# Altium PCB EE52_Digital_Oscilloscope.PcbDoc (part 4 of 5)
Units mil, origin at the board's own origin, x right, y up, seen from the top; angles counter-clockwise.
Board outline 7431 x 5662 mil, 2 copper layers (Top Layer, Bottom Layer); 305 components, 396 nets, 1532 pads, 389 vias.
Unrouted connection lines stored in the file: 2.
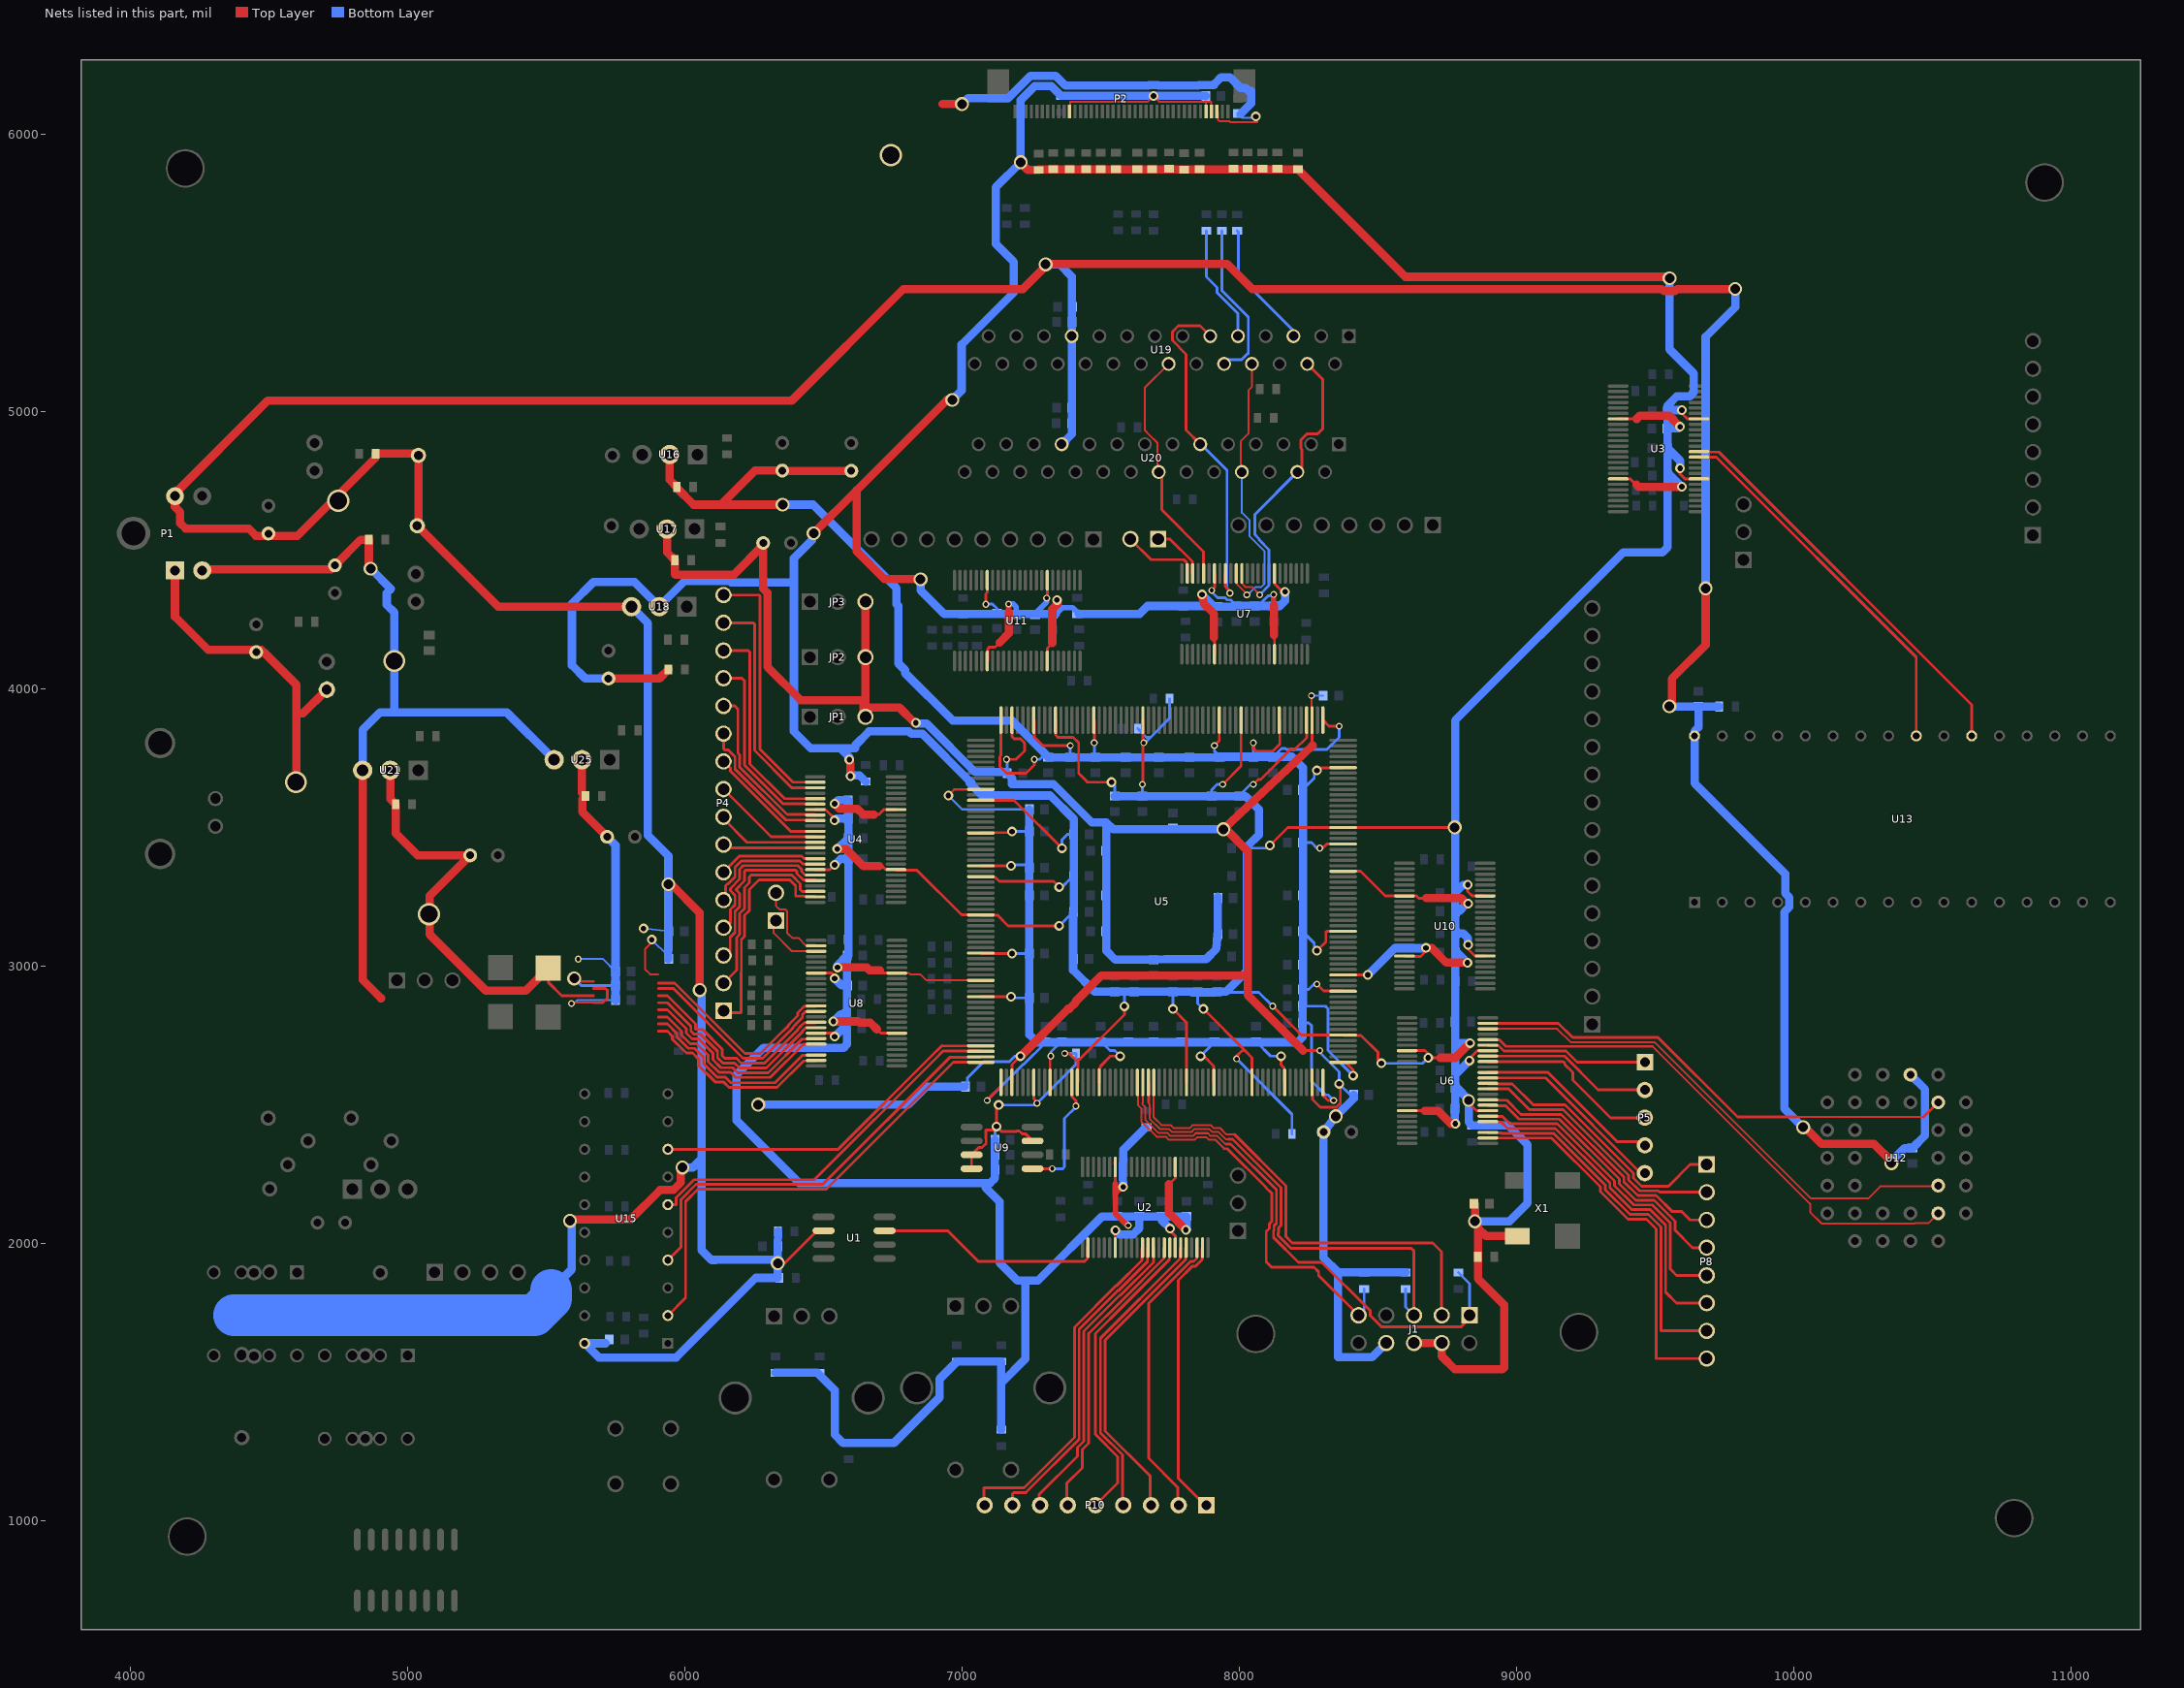
[diagram p4: the nets of this part, all layers, seen from the top]

## Via types
v1: diameter 35, hole 20, Top Layer to Bottom Layer, 188 vias
v2: diameter 25, hole 15, Top Layer to Bottom Layer, 82 vias
v3: diameter 60, hole 42, Top Layer to Bottom Layer, 48 vias
v4: diameter 50, hole 35, Top Layer to Bottom Layer, 46 vias
v5: diameter 80, hole 62, Top Layer to Bottom Layer, 14 vias
v6: diameter 40, hole 20, Top Layer to Bottom Layer, 10 vias
v7: diameter 45, hole 30, Top Layer to Bottom Layer, 1 vias

## Nets (pads, with @x,y where several pads share a name; then routed paths per layer and width w, separated by ;. In a path a pad name is that pad's centre, name@x,y a point inside that pad or via, vN(x,y) a via of type N, cw(c..) or ccw(c..) an arc to the next point about the centre after c; other vN are vias at no path point) (continued)
NetU3_11: U3.11 U13.24 | length 1402.3
  Top Layer w10: U3.11@9692.56,4834.07 9659.78,4834.07 U3.11@9658,4835.85 9720.15,4835.85 10442,4114 U13.24@10442,3830
NetU3_12: U3.12 U13.22 | length 1474.4
  Top Layer w10: U3.12@9658,4855.54 9659.78,4853.76 9730.24,4853.76 10642,3942 U13.22@10642,3830
NetU5_237: U5.237 U15.8 | length 1262.4
  Top Layer w10: U15.8@5938,2339 6552.85,2339 6886.09,2672.24 6925.89,2712.04 ; 6927.18,2711.89 U5.237@7047.17,2711.89
NetU5_238: U5.238 U15.6 | length 1372.7
  Top Layer w10: U15.6@5938,2139 5968,2139 5968,2164.35 6032.65,2229 6466.89,2229 6905.16,2667.27 6930.86,2692.97 6942.06,2692.97 ; 6942.07,2692.98 U5.238@7066.39,2692.98
NetU5_239: U5.239 U15.4 | length 1530.8
  Top Layer w10: U15.4@5938,1939 5985,1986 5985,2157.31 6039.69,2212 6497,2212 6955.04,2670.04 7005.17,2670.04 7005.87,2670.74 U5.239@7065.39,2670.74
NetU5_240: U5.240 U15.2 | length 1674.4
  Top Layer w10: U15.2@5938,1739 6002,1803 6002,2150.27 6046.73,2195 6510,2195 6967.83,2652.83 U5.240@7030.5,2652.83
NetU6_20: U6.20 U12.22 | length 1930.8
  Top Layer w7: 8962.09,2710 9491.28,2710 10059,2142.28 10059,2112 10100,2071 10436.33,2071 ; 10437.33,2072 10485,2072 U12.22@10521,2108
  Top Layer w10: U6.20@8896.53,2734.07 8938.02,2734.07 8962.09,2710
NetU6_22: U6.22 U12.24 | length 1897.6
  Top Layer w7: U6.22@8896.53,2773.44 9146.64,2773.44 9196.08,2724 9499.2,2724 10062.2,2161 10268,2161 10312,2205 10518,2205 U12.24@10521,2208
NetU6_23: U6.23 U12.31 | length 1786.5
  Top Layer w7: 10006.5,2455 10468,2455
  Top Layer w10: U6.23@8896.53,2793.13 9151,2793.13 9202.12,2742 9510,2742 9797,2455 10006.5,2455 ; 10468,2455 U12.31@10521,2508
NetU7_13: U7.13 U19.4 U20.4 | length 1136.1
  Top Layer w7: U7.13@8008.78,4416 8008.78,4380.22 8022.13,4366.87 ; 8024,4366.6 8046.4,4366.6 8061,4352 8061,4351 v2(8073,4339)
  Top Layer w10: U20.4@8209,4782 8226,4799 8226,4862.67 8222,4866.67 8222,4897.33 8243.67,4919 8282.33,4919 8301,4937.67 8301,5116 U19.4@8245,5172
  Bottom Layer w10: v2(8073,4339) 8106.95,4372.95 8106.95,4501.97 8070.59,4538.33 8072,4539.74 8055.47,4556.27 8055.47,4628.47 U20.4@8209,4782
NetU7_14: U7.14 U19.8 U20.8 | length 1056
  Top Layer w7: U7.14@7989.1,4416 7989.1,4379.9 8030.4,4338.6 v2(8026.93,4338.6) v2@8019.4,4338.6 ; U20.8@8009,4782 8005,4786 8005,4893 8033.5,4921.5 8033.5,5077.09 8045,5088.59 U19.8@8045,5172
  Bottom Layer w7: U20.8@8009,4782 8009,4634.61 8037.03,4606.58 8037.03,4549.97 8090,4497 8090,4377.92 8079.08,4367 8058.8,4367 8022.61,4330.81 v2@8022.61,4338.9 ; v2(8026.93,4338.6) 8022.91,4338.6 v2@8022.61,4338.9 ; v2@8022.61,4338.9 8022.51,4339 8020.75,4337.25 8020.96,4337.25 v2@8022.61,4338.9
NetU7_16: U7.16 U19.11 U20.11 | length 1268.9
  Top Layer w10: U20.11@7859,4882 7808,4933 7808,5206.67 7758,5256.67 7758,5287.33 7779.67,5309 7858,5309 U19.11@7895,5272 ; U7.16@7949.73,4416 7949.73,4369.27 7966,4353 v2(7966,4345)
  Bottom Layer w10: U20.11@7859,4882 7861.33,4882 7955.47,4787.85 7955.47,4363.53 7966,4353 v2(7966,4345)
NetU7_20: U7.20 U19.14 U20.14 | length 879.5
  Top Layer w7: U20.14@7709,4782 7705,4786 7705,4886.2 7673.7,4917.5 7673.5,4917.5 7659,4932 7659,5086 U19.14@7745,5172
  Top Layer w10: U20.14@7709,4782 7720,4771 7720,4646 7870.99,4495.01 U7.20@7870.99,4416
NetU8_13: U8.13 | length 755.4
  Top Layer w10: 5904,2938.6 5962.38,2938.6 6216.87,2684.1 6271.9,2684.1 6355,2767.21 6355,2766 6372.6,2783.6 6372.6,2786.34 6384,2797.74 6384,2798.12 6406.6,2820.72 6406.6,2831.31 6429.73,2854.44 6471.22,2854.44 U8.13@6473,2856.22
NetU8_14: U8.14 | length 751.5
  Top Layer w10: 5904,2918.72 5958.21,2918.72 6209.83,2667.1 6246.02,2667.1 6246.12,2667 6280.04,2667 6389.6,2776.56 6389.6,2779.3 6401,2790.7 6401,2791.08 6423.6,2813.68 6423.6,2824.27 6434.09,2834.76 6471.22,2834.76 U8.14@6473,2836.54
NetU8_16: U8.16 | length 756.7
  Top Layer w10: 5904,2893.13 5936.04,2893.13 6038.4,2790.78 6038.4,2772.56 6039.96,2771 6063.1,2771 6134.57,2699.53 6134.57,2676.39 6143.85,2667.1 6185.79,2667.1 6202.79,2650.1 6238.98,2650.1 6239.08,2650 6287.08,2650 6406.6,2769.52 6406.6,2772.25 6418,2783.66 6418,2784.04 6429.34,2795.39 6471.22,2795.39 U8.16@6473,2797.17
NetU8_17: U8.17 | length 714.3
  Top Layer w10: 5904,2867.54 5936.04,2867.54 6021.4,2782.18 6021.4,2765.52 6032.92,2754 6056.06,2754 6117.57,2692.49 6117.57,2669.35 6136.81,2650.1 6178.75,2650.1 6196.81,2632.04 6293.17,2632.04 6423.6,2762.47 6423.6,2765.21 6434.09,2775.7 6435,2775.7 6435,2777
NetU8_19: U8.19 | length 736.4
  Top Layer w10: 5904,2841.95 5936.04,2841.95 6004.4,2773.59 6004.4,2758.47 6025.88,2737 6049.02,2737 6100.57,2685.45 6100.57,2662.31 6129.77,2633.1 6171.7,2633.1 6189.77,2615.04 6300.21,2615.04 6421.5,2736.33 6471.22,2736.33 U8.19@6473,2738.11
NetU8_20: U8.20 | length 730.8
  Top Layer w10: 5904,2816.36 5936.04,2816.36 5987.4,2765 5987.4,2751.43 6018.83,2720 6041.98,2720 6083.57,2678.41 6083.57,2655.26 6122.73,2616.1 6164.66,2616.1 6182.72,2598.04 6307.25,2598.04 6427.63,2718.43 U8.20@6473,2718.43
NetU8_22: U8.22 | length 718.9
  Top Layer w10: 5904,2790.77 5936.04,2790.77 5970.4,2756.41 5970.4,2744.39 6011.79,2703 6034.94,2703 6066.57,2671.37 6066.57,2648.22 6115.69,2599.1 6145.76,2599.1 6166.03,2578.84 6325.16,2578.84 6423.6,2677.28 6471.22,2677.28 U8.22@6473,2679.06
NetU8_23: U8.23 | length 713.3
  Top Layer w10: 5904,2765.18 5936.04,2765.18 5953.4,2747.82 5953.4,2737.35 6004.75,2686 6027.9,2686 6049.57,2664.33 6049.57,2641.18 6108.65,2582.1 6138.72,2582.1 6158.99,2561.84 6332.2,2561.84 6427.96,2657.59 6471.22,2657.59 U8.23@6473,2659.37
RED0: R74.2 U19.5 | length 463.6
  Bottom Layer w10: R74.2@7992,5651.47 7997,5646.47 7997,5490 8195,5292 U19.5@8195,5272
RED1: R73.1 U19.10 | length 585.1
  Bottom Layer w10: R73.1@7937,5652.47 7937,5436 8029,5344 8029,5343.67 8032,5340.67 8032,5209 8029.67,5209 8008,5187.33 7960.33,5187.33 U19.10@7945,5172
RED2: R76.2 U19.9 | length 427.7
  Bottom Layer w10: R76.2@7881,5652.47 7881,5486 7920,5447 7920,5428.96 7995,5353.96 U19.9@7995,5272
RESET: U1.7 U2.2 | length 822.7
  Top Layer w10: U1.7@6720,2045 6948,2045 7058.4,1934.6 7441.42,1934.6 7451.91,1945.09 7451.91,1984 U2.2@7453.69,1984
SROMNCS: U5.14 U9.1 | length 451
  Top Layer w10: U9.1@7254,2269 v2(7325,2269) ; U5.14@7395.91,2580 7395.91,2529.09 7410,2515 v2(7410,2495)
  Bottom Layer w10: v2(7325,2269) 7363,2269 7369,2275 7369,2449.96 7414.04,2495 v2(7410,2495)
TCK: J1.1 R11.2 U5.27 | length 1973
  Top Layer w7: 7650.91,2506.16 7650.91,2500.89 7660,2491.8 7660,2445.4 7707.4,2398 7740.4,2398 7751.4,2387 7832.6,2387 7842.6,2397 7886.4,2397 7896.4,2387 7905.61,2387 7906.72,2388.1 7918.32,2388.1 7948.42,2358 7952.66,2358 ; 7651.81,2506.16 U5.27@7651.81,2580
  Top Layer w10: 7952.66,2358 7968.92,2358 8133.5,2193.42 8133.5,2071.66 8125,2063.16 8125,2046.7 8123,2044.7 8123,2021.2 8213.2,1931 8297.73,1931 8471.53,1757.2 8471.53,1739.74 8513.27,1698 8800,1698 8830,1728 J1.1@8830,1740 J1.1@8812.8,1722.8
  Bottom Layer w10: R11.2@8790,1894.53 8830,1854.53 J1.1@8830,1740
TDI: J1.9 R1.1 U5.26 | length 1484.5
  Top Layer w7: U5.26@7633.91,2580 7633.91,2498.09 7646,2486 7646,2439.6 7701.6,2384 7734.6,2384 7745.6,2373 7838.4,2373 7848.4,2383 7880.6,2383 7890.6,2373 7911.41,2373 7912.52,2374.1 7945.62,2341
  Top Layer w10: 7945.62,2341 7956.73,2341 8096.22,2201.51 8096.22,2200.5 8116.5,2180.22 8116.5,2078.7 8108,2070.2 8108,2053.75 8097,2042.75 8097,1933 8116,1914 8269.04,1914 8286,1897.04 8286,1884 J1.9@8430,1740
  Bottom Layer w10: J1.9@8450,1760 R1.1@8450,1835.47
TDO: J1.3 U5.29 | length 1708.7
  Top Layer w7: U5.29@7691.18,2580 7691.18,2453.82 7719,2426 7751.99,2426 7762.99,2415 7821.01,2415 7831.01,2425 7897.99,2425 7906.89,2416.1 7929.91,2416.1 7954.02,2392 7983,2392
  Top Layer w10: 7983,2392 8167.5,2207.5 8167.5,2024.78 8190.78,2001.5 8697.5,2001.5 8729,1970 J1.3@8729,1741
TMS: J1.5 R2.1 U5.28 | length 1747.5
  Top Layer w7: 7673.28,2508.72 7673.28,2504.13 7677.18,2500.22 7677.18,2448.02 7713.2,2412 7746.2,2412 7757.2,2401 7826.8,2401 7836.8,2411 7892.2,2411 7901.09,2402.1 7924.11,2402.1 7951.22,2375 7959.7,2375
  Top Layer w10: 7673.28,2508.72 U5.28@7673.28,2580 ; 7959.7,2375 7975.96,2375 8150.5,2200.46 8150.5,2064.62 8142,2056.12 8142,2039.66 8140,2037.66 8140,2028.24 8186.24,1982 8620,1982 8630,1972 J1.5@8630,1740
  Bottom Layer w10: R2.1@8600,1835.47 8600,1770 J1.5@8630,1740
UNUSED0_0: P4.16 U4.2 | length 934.6
  Top Layer w10: P4.16@6139,4338 6267,4338 6270.02,4334.98 6270.02,3782.02 6389.29,3662.76 U4.2@6470,3662.76
UNUSED0_1: P4.15 U4.3 | length 845.1
  Top Layer w10: P4.15@6139,4238 6247,4238 6251,4234 6251,3777 6384.93,3643.07 U4.3@6470,3643.07
UNUSED0_2: P4.14 U4.5 | length 788.9
  Top Layer w10: P4.14@6139,4138 6229,4138 6234,4133 6234,3729.04 6359.34,3603.7 U4.5@6470,3603.7
UNUSED0_3: P4.13 U4.6 | length 697.1
  Top Layer w10: P4.13@6139,4038 6205,4038 6214.53,4028.47 6214.53,3724.47 6353.21,3585.79 6468.22,3585.79 U4.6@6470,3584.02
UNUSED0_4: P4.12 U4.8 | length 612.3
  Top Layer w10: P4.12@6139,3938 6179,3938 6191,3926 6191,3768.77 6197.53,3762.24 6197.53,3717.43 6368.53,3546.42 6468.22,3546.42 U4.8@6470,3544.65
UNUSED0_5: P4.11 U4.9 | length 519.1
  Top Layer w10: P4.11@6139,3838 6139,3783 6142.47,3779.53 6156.2,3779.53 6180.53,3755.2 6180.53,3710.39 6364.18,3526.74 6468.22,3526.74 U4.9@6470,3524.96
UNUSED0_6: P4.10 U4.11 | length 441.5
  Top Layer w10: P4.10@6139,3738 6163.53,3713.47 6163.53,3703.35 6381.29,3485.59 U4.11@6470,3485.59
UNUSED0_7: P4.9 U4.12 | length 402.3
  Top Layer w10: P4.9@6139,3638 6311.09,3465.91 U4.12@6470,3465.91
UNUSED0_8: P4.8 U4.13 | length 373.1
  Top Layer w10: P4.8@6139,3538 6139,3531 6223.78,3446.22 U4.13@6470,3446.22
UNUSED0_9: P4.7 U4.14 | length 335.7
  Top Layer w10: P4.7@6139,3438 6150.46,3426.54 U4.14@6470,3426.54
UNUSED0_10: P4.6 U4.16 | length 364.9
  Top Layer w10: P4.6@6139,3338 6140,3337 6146.53,3337 6146.53,3346.21 6196.32,3396 6421.21,3396 6430.04,3387.17 U4.16@6470,3387.17
UNUSED0_11: P4.5 U4.17 | length 445.2
  Top Layer w10: P4.5@6139,3238 6146.53,3238 6146.53,3289.69 6153.31,3296.47 6156.2,3296.47 6180.53,3320.8 6180.53,3356.17 6203.36,3379 6414.17,3379 6425.69,3367.48 U4.17@6470,3367.48
UNUSED0_12: P4.4 U4.19 | length 562.2
  Top Layer w10: P4.4@6139,3138 6145,3132 6152,3132 6152,3143.12 6163.53,3154.65 6163.53,3203.8 6180.53,3220.8 6180.53,3255.2 6163.53,3272.2 6163.53,3279.76 6197.53,3313.76 6197.53,3349.12 6210.4,3362 6407.12,3362 6420.6,3348.53 6420.6,3340.38 6432.87,3328.11 U4.19@6470,3328.11
UNUSED0_13: P4.3 U4.20 | length 644.1
  Top Layer w10: P4.3@6139,3038 6143,3034 6163,3034 6163,3103.27 6180.53,3120.8 6180.53,3196.76 6197.53,3213.76 6197.53,3262.24 6183.79,3275.98 6214.53,3306.72 6214.53,3342.08 6217.44,3345 6400.08,3345 6403.6,3341.48 6403.6,3333.34 6426.73,3310.2 6470,3310.2 U4.20@6470,3308.43
UNUSED0_14: P4.2 U4.22 | length 699.6
  Top Layer w10: P4.2@6139,2938 6186,2985 6186,3102.23 6197.53,3113.76 6197.53,3189.72 6214.53,3206.72 6214.53,3282.67 6231.53,3299.67 6231.53,3321.57 6237.96,3328 6384.89,3328 6415.86,3297.03 6415.86,3276.27 6423.08,3269.06 U4.22@6470,3269.06
UNUSED0_15: P4.1 U4.23 | length 822.2
  Top Layer w10: P4.1@6139,2838 6145,2832 6202,2832 6202,2976.96 6203,2977.96 6203,3095.19 6214.53,3106.72 6214.53,3182.67 6231.53,3199.67 6231.53,3275.63 6266.9,3311 6377.85,3311 6398.86,3289.99 6398.86,3252.06 6430.18,3252.06 6431.09,3251.15 6468.22,3251.15 U4.23@6470,3249.37
UNUSED0_16: P11.2 U8.2 | length 297.2
  Top Layer w7: P11.2@6328,3264 6328,3217.29 6341.26,3204.03 6361.88,3204.03 6368.03,3197.88 6368.03,3119.97 6388,3100 6410.74,3100 6434.71,3076.03 6469.72,3076.03 U8.2@6473,3072.76
UNUSED0_17: P11.1 U8.3 | length 228.6
  Top Layer w7: P11.1@6328,3164 6320,3156 6320,3119 6385.93,3053.07 U8.3@6473,3053.07
UNUSED1_0: P10.9 U2.12 | length 1252.6
  Top Layer w10: P10.9@7078,1055 7078,1118 7222.96,1118 7405,1300.04 7405,1696.97 7554,1845.97 7556.6,1845.97 7648.76,1938.13 7648.76,1982.22 U2.12@7650.54,1984
UNUSED1_1: P10.8 U2.13 | length 1155.3
  Top Layer w10: P10.8@7181,1055 7181,1095.86 7181.18,1095.86 7186.31,1101 7230,1101 ; 7232.5,1103.5 7422,1293 7422,1689.93 7561.04,1828.97 7563.64,1828.97 7668.44,1933.78 7668.44,1982.22 U2.13@7670.22,1984
UNUSED1_2: P10.7 U2.14 | length 1114.7
  Top Layer w10: P10.7@7278,1044 7278,1094 7416,1232 7416,1262.96 7439,1285.96 7439,1682.89 7568.08,1811.97 7570.68,1811.97 7689.91,1931.2 U2.14@7689.91,1984 U2.14@7688.13,1982.22
UNUSED1_3: P10.6 U2.16 | length 1076
  Top Layer w10: P10.6@7378,1055 7378,1135 7433,1190 7433,1255.92 7456,1278.92 7456,1675.85 7458.26,1675.85 7577.38,1794.97 7577.72,1794.97 7727.5,1944.75 7727.5,1982.22 U2.16@7729.28,1984
UNUSED1_4: P10.5 U2.17 | length 1107.3
  Top Layer w10: P10.5@7481,1055 7561,1135 7561,1229.92 7480,1310.92 7480,1673.55 7584.42,1777.97 7584.76,1777.97 7747.18,1940.39 7747.18,1982.22 U2.17@7748.96,1984
UNUSED1_5: P10.4 U2.19 | length 1081.6
  Top Layer w10: P10.4@7578,1055 7578,1236.96 7499,1315.96 7499,1657.54 7786.55,1945.09 7786.55,1982.22 U2.19@7788.33,1984
UNUSED1_6: P10.3 U2.20 | length 1117.1
  Top Layer w10: P10.3@7678,1055 7678,1161 7516,1323 7516,1650.49 7806.24,1940.73 7806.24,1982.22 U2.20@7808.02,1984
UNUSED1_7: P10.2 U2.22 | length 1074.6
  Top Layer w10: P10.2@7796,1039 7778,1057 7778,1119 7673,1224 7673,1783.45 7824.15,1934.6 7835.12,1934.6 7845.61,1945.09 7845.61,1982.22 U2.22@7847.39,1984
UNUSED1_8: P10.1 U2.23 | length 1051.2
  Top Layer w10: U2.23@7867.07,1984 7865.29,1982.22 7865.29,1940.73 7842.16,1917.6 7831.19,1917.6 7780,1866.41 7780,1152 P10.1@7894,1038 ; P10.1@7870.07,1065.93 P10.1@7881,1055
UNUSED1_9: P8.8 U6.2 | length 1403
  Top Layer w10: U6.2@8896.53,2379.74 9125.97,2379.74 9302.47,2203.24 9302.47,2186.51 9401.98,2087 9469,2087 9504,2052 9504,1584 P8.8@9686,1584
UNUSED1_10: P8.7 U6.3 | length 1316.3
  Top Layer w10: U6.3@8896.53,2399.43 8896.53,2397.65 8945.23,2397.65 8946.13,2396.74 9133.01,2396.74 9319.47,2210.28 9319.47,2193.55 9409.02,2104 9476.04,2104 9521,2059.04 9521,1684 P8.7@9686,1684
UNUSED1_11: P8.6 U6.5 | length 1212.8
  Top Layer w10: U6.5@8896.53,2438.8 8898.31,2437.02 8945.23,2437.02 8968.5,2413.74 9140.05,2413.74 9336.47,2217.32 9336.47,2200.59 9416.06,2121 9483.08,2121 9538,2066.08 9538,1823.17 9577.17,1784 P8.6@9686,1784
UNUSED1_12: P8.5 U6.6 | length 1136.1
  Top Layer w10: U6.6@8896.53,2458.48 8896.53,2456.7 8949.58,2456.7 8975.54,2430.74 9147.09,2430.74 9353.47,2224.36 9353.47,2207.63 9423.1,2138 9490.12,2138 9555,2073.12 9555,1906.17 9577.17,1884 P8.5@9686,1884
UNUSED1_13: P8.4 U6.8 | length 1031.4
  Top Layer w10: U6.8@8896.53,2497.85 8898.31,2496.07 8960.93,2496.07 9009.26,2447.74 9154.13,2447.74 9370.47,2231.4 9370.47,2214.67 9430.15,2155 9497.17,2155 9572,2080.17 9572,2047.17 9635.17,1984 P8.4@9686,1984
UNUSED1_14: P8.3 U6.9 | length 979.9
  Top Layer w10: U6.9@8896.53,2517.54 8896.53,2515.76 8965.28,2515.76 9016.3,2464.74 9161.17,2464.74 9387.47,2238.44 9387.47,2221.72 9437.19,2172 9504.21,2172 9562.21,2114 9596,2114 9626,2084 P8.3@9686,2084
UNUSED1_15: P8.2 U6.11 | length 953.7
  Top Layer w10: U6.11@8896.53,2556.91 8971.09,2556.91 9046.26,2481.74 9168.22,2481.74 9404.47,2245.49 9404.47,2228.76 9444.23,2189 9511.25,2189 9516.25,2184 P8.2@9686,2184
UNUSED1_16: P8.1 U6.12 | length 985.1
  Top Layer w10: U6.12@8896.53,2576.59 8898.31,2574.81 8984.31,2574.81 9060.38,2498.74 9175.26,2498.74 9421.47,2252.53 9421.47,2235.8 9451.27,2206 9548,2206 9626,2284 P8.1@9686,2284
UNUSED1_17: P5.5 U6.13 | length 708.7
  Top Layer w10: U6.13@8896.53,2596.28 9104.72,2596.28 9448,2253 P5.5@9463,2253
UNUSED1_18: P5.4 U6.14 | length 675.4
  Top Layer w10: U6.14@8896.53,2615.96 9113.04,2615.96 9363,2366 9450,2366 P5.4@9463,2353
UNUSED1_19: P5.3 U6.16 | length 660
  Top Layer w10: U6.16@8896.53,2655.33 9168.58,2655.33 9174,2649.92 9174,2644.96 9203,2615.96 9203,2588 9339,2452 P5.3@9453,2452
UNUSED1_20: P5.2 U6.17 | length 602.6
  Top Layer w10: U6.17@8896.53,2675.02 9172.94,2675.02 9293.96,2554 P5.2@9449,2554
UNUSED1_21: P5.1 U6.19 | length 581.9
  Top Layer w10: U6.19@8896.53,2714.39 8898.31,2712.61 8935.44,2712.61 8955.05,2693 9179,2693 9219,2653 P5.1@9453,2653
UNUSED2_2: P7.1 U7.22 | length 200.3
  Top Layer w10: P7.1@7707,4540 7749.11,4540 7829.84,4459.27 7829.84,4417.78 U7.22@7831.62,4416
UNUSED2_3: P7.2 U7.23 | length 279.1
  Top Layer w10: P7.2@7607,4540 7681.6,4465.4 7799.66,4465.4 7810.15,4454.91 7810.15,4416 U7.23@7811.93,4416
VCC5: C1.2 C92.2 C93.2 C96.2 C99.2 C105.2 C106.2 C107.2 C109.2 C112.1@4497,4560 C123.2 P1.2 R5.1 R46.2 R53.1 R61.1 R63.1 R105.1 U1.2 U12.32 U13.32 U15.20 U18.3 U19.21 U20.21 | length 20069.5
  Top Layer w7: v1@5840,3125 v1(5850,3135) ; v1(5880,3095) 5880,3085 5856.1,3061.1 5856.1,2987.89 5874.08,2969.91 5904,2969.91
  Top Layer w10: v4(6334.4,1928.07) 6359.07,1928.07 6476,2045 U1.2@6500,2045 ; v4(10034,2418) 10037.5,2418 10045.5,2410 v4@10047,2411.5 ; v4(10352.5,2289) v4@10352.5,2295.22 ; U12.32@10421,2606 U12.32@10421,2608
  Top Layer w30: P1.2@4152,4696.72 4494.28,5039 6385,5039 6788,5442 7219,5442 7310,5533 7955,5533 8046,5442 9524.53,5442 9532.53,5434 9571.47,5434 9579.47,5442 v4(9789,5442) ; P1.2@4160,4668.72 4160,4656 4179,4637 4179,4597 4198,4578 4426,4578 4452,4552 4602,4552 4883.53,4833.53 R105.1@4883.53,4848 5032,4848 R61.1@5038,4842 5038,4592 R63.1@5034,4588 5326,4296 U18.3@5807,4296 ; v4@5580,2075 5591,2086 5804,2086 5910,2192 5957.47,2192 5985,2219.53 5985,2267 v4(5991,2273) ; v4(5940,3295) 5950,3295 6053,3192 v4(6053,2913) ; v4(9551.56,3936.44) 9560,3944.88 9560,4036 9682,4158 v4(9682,4362) ; v4@10047,2411.5 10100.5,2358 10289.72,2358 10352.5,2295.22 v4@10355.61,2292.11
  Bottom Layer w7: v1(5850,3135) C123.2@5940,3125 ; v1(5880,3095) 5938.5,3036.5 5942.44,3032.56 C99.2@5942.44,3025 ; 5940,3057.44 5942.44,3055 ; v4(6334.4,1928.07) 6333,1929.47 6334.4,1931.93 6334.44,1931.99 6335.76,1934.31 v4@6339,1940
  Bottom Layer w10: v4(10352.5,2289) 10346,2289 10352.5,2295.5 v4@10361,2304
  Bottom Layer w30: 5517,1832 5591,1906 v4@5591,2081 ; C96.2@5713.44,1639 U15.20@5638,1639 5689,1588 5968.11,1588 6255.11,1875 6333.91,1875 6333.91,1875.06 v4(6334.4,1928.07) ; U18.3@5807,4296 5866,4237 5866,3471.33 5940,3397.33 v4(5940,3295) 5940,3125 5940,3057.44 ; C99.2@5938.5,3025 5938.5,3036.5 5938.5,3066.36 ; v4(5991,2273) 6028,2273 6060,2305 ; v4(6053,2913) 6060,2906 6060,2305 ; 6102,1940 v4@6334.51,1940 ; 6111,1939 6096,1939 6060,1975 6060,2305 ; v4@6334.47,1935.04 v4@6334.51,1940 ; v4@6334.51,1940.04 6334.53,1941.99 6334.97,1989 R53.1@6335.47,2043 ; v4@6339,1940 v4@6334.51,1940 ; v4(7301,5531) 7351,5531 7396,5486 7396,5377 7396,5273 U19.21@7395,5272 7395,4918 U20.21@7359,4882 ; v4(9551.56,3936.44) C92.2@9656,3936.44 9656.44,3936 R46.2@9730.47,3936 ; C92.2@9656,3931 9656,3861 9642,3847 U13.32@9642,3830 9642,3659.18 9969,3332.18 9969,3262.4 9984,3247.4 9984,3212.6 9965.5,3194.1 9965.5,2486.5 v4(10034,2418) ; v4(9682,4362) 9682,5269 9789,5376 v4(9789,5442) ; v4(10352.5,2289) v4@10352.5,2295.5 ; v4@10361,2304 10400.06,2343.06 C93.2@10428,2343.06 10474,2389.06 10474,2555 U12.32@10421,2608 ; v4(6334.4,1928.07) 6334.4,1931.93 6334.44,1931.99 v4(6334.4,1928.07)
  Bottom Layer w150: 4372.5,1740 5457,1740 5517,1800 5517,1832
  other v4: 5585,2081
  other v5: 4749,4678
VCC5A: C98.2 C102.1 C121.2 C122.2 R101.2 U25.2 | length 1736.9
  Top Layer w7: v2@5601.75,2867.54 5669.75,2867.54 ; v2(5615,3025) v2@5621.85,3018.15
  Top Layer w10: v4(5600,2955) 5614.43,2955 5603.75,2944.32 5669.75,2944.32 ; 5669.75,2867.54 5702.54,2867.54 5719.15,2884.15 5719.15,2912.85 5713,2919 5670.02,2919 5669.75,2918.72
  Top Layer w30: U25.2@5628,3744 5628,3625.47 R101.2@5640.47,3613 5629,3601.53 5629,3556 C102.1@5719,3466
  Bottom Layer w7: v2(5590,2865) 5590,2857 5591,2856 5612,2877 C121.2@5749.44,2877 ; v2(5615,3025) 5704.44,3025 C122.2@5749.44,2980
  Bottom Layer w10: v4@5600,2965 v4(5600,2955) 5626,2929 C98.2@5749.44,2929
  Bottom Layer w30: C102.1@5719,3466 5749.44,3435.56 C122.2@5749.44,2980 C98.2@5749.44,2929 C121.2@5749.44,2877
VCC33: C2.2 C3.2 C4.2 C5.2 C6.2 C7.2 C8.2 C9.2 C10.2 C11.2 C12.2 C13.2 C14.2 C15.2 C16.2 C17.2 C18.2 C19.2 C20.2 C21.2 C22.2 C23.2 C24.2 C25.2 C26.2 C27.2 C28.2 C29.2 C30.2 C31.2 C32.2 C33.2 C34.2 C35.2 C36.2 C37.2 C76.2 C77.2 C78.2 C79.2 C80.2 C81.2 C82.2 C83.2 C84.2 C85.2 C86.2 C87.2 C88.2 C89.2 C90.2 C91.2 C104.1 C115.2 J1.4 J1.6 P2.3 P2.4 P2.29 R3.2 R4.2 R6.2 R9.2 R12.2 R13.1 R15.2 R22.2 R23.2 R24.2 R26.2 R28.2 R30.2 R39.2 R40.2 R41.2 R45.1 R54.1 R55.1 R57.1 R58.1 R59.1 R60.1 R66.2 R69.1 R70.2 R71.1 R72.2 R75.1 R77.1 R78.2 R79.1 R80.2 R81.1 R85.1 R86.2 R87.1 R88.2 R89.1 R90.2 R93.2 U2.7 U2.18 U2.31 U2.42 U3.7 U3.18 U3.31 U3.42 U4.7 U4.18 U4.31 U4.42 U5.7 U5.15 U5.35 U5.47 U5.66 U5.77 U5.96 U5.104 U5.124 U5.136 U5.154 U5.170 U5.192 U5.206 U5.213 U5.225 U6.7 U6.18 U6.31 U6.42 U7.7 U7.18 U7.31 U7.42 U8.7 U8.18 U8.31 U8.42 U9.3 U9.7 U9.8 U10.7 U10.18 U10.31 U10.42 U11.7 U11.18 U11.31 U11.42 U18.2 X1.4 | length 40686.1
  Top Layer w7: U8.42@6764.34,2974.33 6808.14,2974.33 6812.47,2970 6848.6,2970 6870.49,2948.11 U5.225@7067.17,2948.11 ; 7167.73,4275.27 7168,4275 ; P2.29@7387.5,6081.5 7389.91,6081.5 7389.91,6116.6 7668.6,6116.6 v1(7690,6138) 7710,6118 7710,6117.37 7879.63,6117.37 P2.4@7879.63,6081.5 ; U2.42@7551.09,2293.34 7552.92,2275.42 U2.42@7553.02,2274.43 ; 7879,6118 7899,6118 7899,6081.81 P2.3@7899.31,6081.5 ; v2(8123.61,4340) v2@8126.89,4336.72 ; U5.124@8242.36,3838.36 U5.124@8242.36,3887.09 ; 9565,4970 9565,4972
  Top Layer w10: U4.18@6470,3347.8 6522.8,3347.8 v1(6540,3365) ; U4.7@6470,3564.33 6507.13,3564.33 6539,3532.46 v1(6539,3525) ; U8.18@6473,2757.8 6537.2,2757.8 6540,2755 v1(6540,2745) ; U8.7@6473,2974.33 6529.33,2974.33 6529.6,2974.6 6540,2964.2 v1(6540,2955) ; 6682,3546.5 6699.61,3546.5 6717.44,3564.33 U4.42@6761.34,3564.33 ; 6693,2771 6706.2,2757.8 U8.31@6764.34,2757.8 ; 6704,2975.24 6763.43,2975.24 U8.42@6764.34,2974.33 ; 6711.94,3360.06 6722.43,3349.57 6759.56,3349.57 U4.31@6761.34,3347.8 6763.12,3346.02 6836.03,3346.02 6997.71,3184.33 U5.213@7067.17,3184.33 7068.94,3182.55 7128.46,3182.55 7166.01,3145 v1(7350,3145) ; U9.8@7034,2269 U9.7@7034,2319 7060,2345 7071.94,2345 7086,2359.06 7086,2378.94 7085.47,2379.47 7085.47,2408.53 7111.53,2408.53 v1(7124,2421) ; U5.206@7067.17,3322.13 7068.94,3320.35 7118.68,3320.35 7134.02,3305 7330,3305 v1(7350,3285) ; U5.192@7067.17,3597.72 7187.28,3597.72 v1(7360,3425) ; v2(7085,4305) 7085,4342.53 7090.36,4347.88 U11.18@7090.36,4391.56 ; U11.31@7090.36,4100.22 7092.13,4102 7092.13,4145.21 7096.54,4149.62 7118.13,4149.62 7134.5,4166 ; v1(7131.69,2498.5) 7131.69,2500.31 7126,2506 7124,2504 v1(7124,2421) ; U9.3@7254,2369 7228,2395 7216.06,2395 7206.06,2405 7196.72,2405 7194.22,2402.5 7142.5,2402.5 v1(7124,2421) ; U5.7@7258.11,2580 7258.11,2519.89 7270,2508 v2(7270,2505) ; U11.42@7306.89,4100.22 7306.89,4146.89 7325,4165 ; v2@7306.89,4321.11 U11.7@7306.89,4356.55 ; U5.170@7336.85,3887.09 7336.85,3833.15 7345,3825 7400,3825 7420,3805 7420,3695 7451.5,3663.5 7451,3663 v1(7539,3663) ; v1(7342,4320) 7342,4310 v1@7345,4307 ; v2(7370,2685) 7385,2685 7415.59,2654.41 ; U5.15@7417.37,2581.78 7417.37,2657.37 7585,2825 v1(7585,2855) ; U2.42@7551.09,2293.34 7551.3,2275.33 7552,2214 ; U2.7@7552.11,1984 7552.11,2045.33 v1(7553,2046.22) ; v1@7576,2203 v1(7581,2203) ; v2(7650,3655) 7650,3665 7651.81,3666.81 v2@7651.81,3795 ; U5.154@7651.81,3887.09 v2@7651.81,3795 ; v2(7655,3805) 7655,3798.19 v2@7651.81,3795 ; 7746,2213 7768.65,2235.65 U2.31@7768.65,2275.34 ; v1(7750,2053) 7751,2052 7751,2044 7768.65,2026.35 U2.18@7768.65,1984 ; v1(7760,2845) 7809.29,2795.71 U5.35@7809.29,2580 ; v1(7870,2845) 8020,2695 ; v2(7900,4355) 7910.36,4365.36 U7.18@7910.36,4416 ; 7908.58,4184 7910.36,4182.22 U7.31@7910.36,4124.66 ; v2(7940,3655) 8006.14,3721.14 U5.136@8006.14,3887.09 ; v2(7990,2665) 7990,2675 8010,2695 8020,2695 ; U5.47@8045.51,2580 8045.51,2669.49 8020,2695 ; v2(8050,3655) 8068,3673 8077,3673 8184.5,3780.5 8199.65,3780.5 8242.36,3823.21 U5.124@8242.36,3838.36 ; v1(8110,3435) 8174.29,3499.29 U5.104@8374.25,3499.29 v4@8782.29,3499.29 ; v2(8120,2855) 8223.74,2751.26 U5.66@8374.25,2751.26 8376.03,2749.48 8438.83,2749.48 8499.5,2688.81 8499.5,2661.5 v1(8512,2649) ; 8123.61,4302.39 8125,4301 ; 8125,4193 8126.89,4191.11 U7.42@8126.89,4124.66 ; U7.7@8126.89,4416 8126.89,4378.87 8155.76,4350 v1(8165,4350) v1@8168,4350 ; U5.77@8374.25,2967.8 8461.2,2967.8 8463,2966 v1(8463,2968) ; U5.96@8374.25,3341.81 8437.05,3341.81 8526.22,3252.65 U10.31@8595.66,3252.65 8639.16,3252.65 8647.31,3244.5 8674,3244.5 ; U10.42@8595.66,3036.11 8597.44,3034.33 8653.33,3034.33 8673,3054 v1(8673,3065) ; U6.42@8605.19,2478.17 8668,2478.17 ; U6.31@8605.19,2694.7 8670,2694.7 8681,2683.7 v1(8681,2669) 8724,2669 ; v1(8824,3293) 8824,3269 8840,3253 8840,3252.65 U10.18@8887,3252.65 ; v1(8825,3076) 8825,3070.98 8820,3065.98 8848.09,3037.89 8850,3037.89 8850,3036.11 U10.7@8887,3036.11 ; v7(8827,2515) 8827,2506 8854.83,2478.17 U6.7@8896.53,2478.17 ; v1(8830,2659) 8823.69,2659 8857.62,2692.92 8857.92,2692.92 8859.7,2694.7 U6.18@8896.53,2694.7 ; U3.42@9366.66,4757.11 9410.17,4757.11 9431.28,4736 9433,4736 ; U3.31@9366.66,4973.65 9433.65,4973.65 ; v1(9590,4795) 9590,4774.72 9607.61,4757.11 U3.7@9658,4757.11 U3.7@9663,4757.11 ; v1@9595,4995 9616.35,4973.65 U3.18@9658,4973.65
  Top Layer w20: 7167.73,4275.27 v2(7167.73,4305.48) ; 7552,2214 7553.02,2105.98 7594,2065 v2@7600,2065 ; 7556,2183 v1@7576,2203 ; 8123.61,4302.39 v2(8123.61,4340)
  Top Layer w30: C104.1@5724,4037 5907.47,4037 R66.2@5940.47,4070 ; v4(6464,4561) 6620,4717 ; v1(6535,2800) 6623,2800 6628,2795 6669,2795 6693,2771 ; v1(6540,3585) 6558,3567 6622,3567 6642.5,3546.5 6682,3546.5 ; v1(6549,3422) 6582,3422 6643.94,3360.06 6701.94,3360.06 ; v1(6550,2995) 6655.14,2995 6665.64,2984.5 6703.83,2984.5 6704,2984.33 ; v1(6593,3744) 6593,3737 6597,3733 v1(6597,3685) ; v4(6850,4395) 6720,4395 6620,4495 6620,4717 ; v4(6964,5042) 6945,5042 6620,4717 ; 7134.5,4166 7168,4199.5 7168,4275 ; v4@7214.9,5893 7236.43,5871.47 R90.2@7276,5871.47 ; R90.2@7276,5873.47 R77.1@7329,5873.47 R87.1@7447,5873.47 7632,5873.47 7801,5873.47 8211.53,5873.47 8599,5486 9547,5486 v4(9552,5481) ; 7325,4165 7325,4287 v1@7345,4307 ; 7746,2213 7746,2109 v1(7807,2048) ; v1(7865,4340) 7872.43,4306.57 7908.58,4270.42 7908.58,4184 ; 8125,4193 8125,4301 ; J1.6@8630,1640 J1.4@8730,1640 8730,1593 8778,1545 8949,1545 8955,1551 8955,1778 8860.47,1872.53 R13.1@8860.47,1951 8860.47,2055.53 ; 8668,2478.17 8715.95,2478.17 8763.11,2431 v1(8779,2431) ; v1(8673,3065) 8694,3065 8747,3012 v1(8823,3012) ; 8674,3244.5 8799.5,3244.5 8800,3245 v1@8820,3225 ; 8724,2669 8779,2669 v1(8832,2722) ; C14.2@8850,2141.56 v4(8850,2079) 8860.47,2058.53 8860.47,2055.53 ; X1.4@9002.9,2026 8890,2026 8860.47,2055.53 ; 9433,4736 9441,4728 9595,4728 v1(9596,4729) ; 9433.65,4973.65 9445,4985 9552,4985 9565,4972 ; 9565,4970 v1(9590,4945)
  Bottom Layer w7: C32.2@7261.28,4269.28 C32.2@7261.56,4269.56 ; C37.2@7327,4268.56 C37.2@7327,4269.56 ; v1@7675,6138.53 7676.47,6138.53 7690,6125 v1(7690,6138) ; v2@7895.9,4354.1 v2@7900,4358.2 ; v2(7900,4355) 7903.2,4355 v2@7900,4358.2 ; v2@7901.8,4360 v2@7900,4358.2 ; v2@8040,3655 v2(8050,3655) ; C22.2@8778.47,2624 C22.2@8779.56,2624 ; C4.2@9542.56,4939 C4.2@9544.47,4939 ; C5.2@9544.56,5002 C5.2@9551.56,4995
  Bottom Layer w10: C26.2@6582.44,2775 C26.2@6584.44,2775 ; C20.2@6584.44,2930 C20.2@6586.44,2930 C20.2@6584.44,2932 ; C25.2@6585.44,3038 C25.2@6589,3038 ; C6.2@6589,3597.56 C6.2@6589.44,3598 ; 7026.51,3660.51 7033.35,3660.51 ; v2(7085,4305) 7110,4305 7125,4290 C33.2@7125,4272.56 ; C29.2@7118.44,2374 7119,2374.56 v1@7119,2414 ; v1(7131.69,2498.5) v2@7268.5,2498.5 ; v2(7270,2505) 7410.47,2645.47 R24.2@7410.47,2685 v2(7370,2685) ; v1@7342,4317 v1(7342,4320) ; v1(7350,3145) 7400,3195 C84.2@7402.44,3195 ; v1(7350,3285) 7350,3275 7400,3325 C78.2@7402.44,3325 ; v1(7360,3425) 7360,3455 7380,3475 C77.2@7402.44,3475 ; v1(7539,3663) 7550,3652 C79.2@7550,3612.56 ; v1(7585,2855) 7585,2907.44 ; R22.2@7633.53,3856 7664.53,3825 7680,3825 ; C76.2@7650,3612.56 v2(7650,3655) ; v2(7655,3805) 7660,3805 7680,3825 ; R26.2@7748.53,3964 7748.53,3893.53 7680,3825 ; v1(7760,2845) C89.2@7760,2907.44 ; C9.2@7800.28,2087.72 C9.2@7809,2096.44 ; C91.2@7850,2907.44 7850,2905 7850,2865 v1(7870,2845) ; v2@7895.9,4354.1 7907.55,4342.45 7907.55,4342.16 7921.9,4327.8 7948.55,4327.8 7955.85,4320.5 7968.06,4320.5 C17.2@7990,4298.56 ; C80.2@7900,3612.56 7900,3635 7920,3655 v2(7940,3655) ; C88.2@7910,2905 8070,2905 v2(8120,2855) ; C24.2@7919.06,4298.5 C24.2@7921,4296.56 ; v2(7990,2665) 8189.53,2465.47 R4.2@8189.53,2395 ; C82.2@7997.56,3612.56 v2@8040,3655 ; C83.2@8027.56,3425 8030,3425 8100,3425 v1(8110,3435) ; C23.2@8067.21,4298.56 8103.65,4335 v2@8123.61,4335 ; v1(8463,2968) v1@8464,2968 ; v1(8512,2649) 8661,2649 v1(8681,2669) ; v1(8673,3065) v1@8673,3070 ; C30.2@8778.47,3266.09 C30.2@8779.56,3265 ; C21.2@8778.56,2561 8780,2559.56 C21.2@8780,2565 ; C31.2@8779.56,3048 C31.2@8787,3048 ; v1@8820,3225 v1(8825,3225) ; C11.2@9543.56,4869 C11.2@9544.47,4868.09 ; C10.2@9545.56,4769 C10.2@9556,4769
  Bottom Layer w20: v2(7167.73,4305.48) 7184.52,4305.48 7195,4295 C36.2@7195,4269.56 ; C32.2@7261.56,4269.56 7305,4313 v2(7305,4327) ; C37.2@7337.77,4269.56 7360.96,4292.75 7398.11,4292.75 R41.2@7419.5,4271.36 ; C8.2@7559,2096.44 7568.56,2096.44 v2@7600,2065
  Bottom Layer w30: C104.1@5724,4037 5640,4037 5592,4085 5592,4307 5670,4385 5818,4385 U18.2@5907,4296 5907,4297.11 5999.41,4389.53 6160.34,4389.53 6166.87,4383 6393,4383 ; R54.1@6326,1532.47 6477.53,1532.47 6540,1470 6540,1310 6570,1280 6753.97,1280 6918,1444.03 6918,1510.47 R55.1@6981,1573.47 R58.1@7141,1573.47 7141,1496 ; v4(6464,4561) 6466,4561 6458,4553 6458,4535.53 6393,4470.53 6393,4383 ; v1(6535,2800) 6561,2826 C19.2@6581.44,2826 ; v1(6539,3525) 6546,3532 C13.2@6588.44,3532 ; v1(6540,2745) 6570,2775 C26.2@6582.44,2775 ; v1(6540,2955) 6565,2930 6584.44,2930 C19.2@6584.44,2826 ; v1(6540,3365) 6561,3386 C12.2@6588.44,3386 ; v1(6540,3585) 6553,3598 C6.2@6589.44,3598 ; v1(6549,3422) 6549.44,3422 C7.2@6588.44,3461 ; v1(6550,2995) 6550,3002.56 C25.2@6584.44,3037 ; C26.2@6584.44,2775 6584.44,2717.44 6572,2705 6283,2705 6186,2608 6186,2443 6411.5,2217.5 7101.38,2217.5 ; C20.2@6584.44,2932 C25.2@6584.44,3037 ; C25.2@6585.44,3038 C25.2@6584.44,3037 ; C25.2@6589,3038 6589,3386 C6.2@6589,3597.56 ; v1(6593,3744) 6593,3753 6561,3785 ; v1(6597,3685) 6595,3687 6630.47,3687 R3.2@6652,3665.47 ; v4(6850,4395) 6850,4355 6935.44,4269.56 C36.2@7185,4269.56 ; v4(6964,5042) 6998,5076 6998,5241.47 7186.5,5429.97 7186.5,5539.36 7121.28,5604.58 7121.28,5809.28 v4(7211,5899) 7211,6123 7262,6174 7321.53,6174 R93.2@7357,6138.53 v1@7675,6138.53 ; 7026.51,3660.51 7072.02,3615 7317.67,3615 7402.44,3530.23 C77.2@7402.44,3475 C78.2@7402.44,3325 C84.2@7402.44,3195 ; 7033.35,3660.51 6856.28,3837.58 6849.44,3837.58 6849.36,3837.5 6816.64,3837.5 6808.14,3846 6663.82,3846 6614,3796.18 6614,3785 6561,3785 ; C29.2@7118.44,2374 C28.2@7118.44,2319 C27.2@7118.44,2265 7118.44,2234.56 7101.38,2217.5 ; R60.1@7141,1327.53 7141,1496 ; C36.2@7195,4269.56 7261.56,4269.56 C37.2@7327,4269.56 ; C37.2@7337.77,4269.56 C37.2@7327,4269.56 ; v1@7342,4317 7342,4284.56 C37.2@7327,4269.56 ; C84.2@7400,3192.56 7400,2985 7477.56,2907.44 C81.2@7550,2907.44 7585,2907.44 C87.2@7620,2907.44 C89.2@7760,2907.44 7827.56,2907.44 7830,2905 7850,2905 C88.2@7910,2905 ; R41.2@7419.5,4271.36 7419.5,4269.56 7639.56,4269.56 7668.56,4298.56 7877,4298.56 7877.06,4298.5 7906.5,4298.5 v1(7865,4340) ; C79.2@7550,3612.56 C76.2@7650,3612.56 C80.2@7900,3612.56 7997.56,3612.56 C82.2@8000,3612.56 8022.44,3612.56 8070,3565 8070,3472.67 8030,3432.67 C83.2@8030,3425 ; v1(7553,2046.22) 7567.22,2032 7617,2032 7639,2054 C3.2@7639,2096.44 ; C8.2@7559,2096.44 7503.94,2096.44 7272.5,1865 7222,1865 ; C8.2@7568.56,2096.44 C3.2@7639,2096.44 ; v1(7581,2203) 7580,2246 7581,2336.86 R23.2@7660.57,2416.43 ; v1@7699,6138.53 7877.91,6138.53 C115.2@7878.44,6138 ; v1(7750,2053) 7719,2084 C2.2@7719,2096.44 ; v1(7807,2048) 7810,2051 C9.2@7810,2094 ; C9.2@7809,2096.44 C2.2@7719,2096.44 ; C88.2@7920,2907.44 7952.44,2907.44 8027.56,2982.56 C90.2@8027.56,3035 C86.2@8027.56,3325 C83.2@8027.56,3425 ; C24.2@7921,4296.56 7988,4296.56 C17.2@7990,4298.56 C23.2@8055,4298.56 8067.21,4298.56 C18.2@8125,4298.56 8145.7,4298.56 8165,4317.86 v1(8165,4350) ; v1@8464,2968 8560,3064 v1@8667,3064 ; C16.2@8777.56,2485 8777.56,2432.44 v1(8779,2431) ; C16.2@8778.47,2495 C22.2@8778.47,2624 ; v4@8778.47,3500 R39.2@8778.47,3359 8778.47,3266.09 C15.2@8778.47,2701.09 ; v4@8778.47,3501 8778.47,3885.47 9385,4492 9526,4492 9544.47,4510.47 R15.2@9544.47,4660 C11.2@9544.47,4868.09 ; C22.2@8779.56,2608.56 v1(8830,2659) ; C22.2@8779.56,2624 C15.2@8779.56,2700 C15.2@8778.47,2701.09 ; C34.2@8779.56,3118 8807,3118 8825,3100 v1(8825,3076) ; C35.2@8779.56,3198 8793,3198 v1@8820,3225 ; C30.2@8779.56,3265 8807.56,3293 v1(8824,3293) ; C21.2@8784,2561 8827,2518 v7(8827,2515) 8827.5,2514.5 8827.5,2437.03 R9.2@8840,2424.53 8970.47,2424.53 9040,2355 9040,2145 8974,2079 v4(8850,2079) ; C31.2@8787,3048 v1(8823,3012) ; v1(8832,2722) 8799.38,2722 C15.2@8778.47,2701.09 ; 9544.47,4983.47 C4.2@9544.47,4939 ; C5.2@9544.56,5002 9544.56,5020.7 9577.5,5053.64 9577.5,5055 9625,5055 9639.5,5069.5 9639.5,5137.36 9552,5224.86 v4(9552,5481) ; C5.2@9551.56,4995 9561.56,5005 v1(9596,5005) ; C10.2@9556,4769 v1(9596,4729) ; v1@9584,4939 C4.2@9544.47,4939 ; v1(9590,4795) 9590,4822.56 C11.2@9544.47,4868.09 ; 6393,4383 6393,3846 6454,3785 6561,3785 ; 7101.38,2217.5 7084.44,2200.56 7135.5,2149.5 7135.5,1929.5 7200,1865 7222,1865 ; 7141,1496 7228,1583 7228,1859 7222,1865 ; C3.2@7639,2096.44 C2.2@7719,2096.44 ; C11.2@9544.47,4868.09 C4.2@9544.47,4939
  other v2: 7599,2064
  other v4: 8777,3500
VCC33A: C119.1 D5.2 R103.2 U21.2 | length 1662.5
  Top Layer w10: D5.2@5507,2992.58 5507,2941 5554.87,2893.13 5669.75,2893.13
  Top Layer w30: U21.2@4937,3706 4937,3602.47 R103.2@4956.47,3583 4956.47,3478.53 5036,3399 C119.1@5225,3399 5079,3253 5079,3114 5282,2911 5425.42,2911 D5.2@5507,2992.58
  other v5: 5076,3187
VCCA: C64.2 C65.2 C66.2 C67.2 C68.2 C69.2 C70.2 C71.2 C72.2 C73.2 C74.1 C75.2 C103.1 J1.8 JP1.3 JP2.3 JP3.3 R1.2 R2.2 R65.2 U5.3 U5.58 U5.123 U5.178 U17.2 | length 10326.8
  Top Layer w7: U5.58@8258.77,2583.28 U5.58@8262.05,2580 ; v2(8260,3975) 8260,3889.13 8260.71,3886.7 U5.123@8262.05,3882.09
  Top Layer w10: v2(7160,3745) 7194,3745 7225,3776 7225,3802.53 7224.5,3803.03 7224.5,3805.15 7210.15,3819.5 7187.44,3819.5 7179.37,3827.57 U5.178@7179.37,3887.09 ; U5.3@7179.37,2580 7179.37,2644.37 v1(7210,2675) ; 8230,2695 8280,2695 8286,2689 8290,2693 v2(8290,2695) ; U5.58@8262.05,2580 8263.83,2578.22 8263.83,2518.7 8292.03,2490.5 8350.15,2490.5 8364.5,2504.85 8364.5,2570.5 v1(8360,2575) ; 8262.05,3791 8262.05,3793.32 U5.123@8262.05,3882.09
  Top Layer w30: U17.2@5935,4576 5935,4492.47 R65.2@5963.47,4464 5963.47,4412.53 5965,4411 6175,4411 C103.1@6282,4518 ; C103.1@6282,4526 C103.1@6282,4518 ; C103.1@6286,4522 C103.1@6282,4518 ; JP1.3@6644,3899 6644,3959 6417.04,3959 6297.02,4079.02 6297.02,4346.16 6282,4361.18 C103.1@6282,4518 ; 6647,3932 6651,3932 ; JP1.3@6651,3899 6651,3932 ; JP3.3@6651,4314 JP2.3@6651,4114 6651,3932 ; v1(6833,3877) 6828,3877 6773,3932 6651,3932 ; v1(7210,2675) 7211.82,2675 7382.32,2845.5 7386.36,2845.5 7409.5,2868.64 7409.5,2872.68 7501.82,2965 8030,2965 ; v4(7941.92,3493.08) 8262.05,3793.32 8263.84,3795 ; v4@7955,3490 8030,3415 8030,2965 ; 8230,2695 8030,2895 8030,2965
  Bottom Layer w7: C67.2@7010,2575 C67.2@7022.44,2575 ; v2(7160,3745) v2@7162.44,3742.56 ; v2(8260,3975) C66.2@8302.44,3975
  Bottom Layer w10: C67.2@7010,2575 7018.74,2583.74 7018.74,2596.26 7077.47,2655 7170,2655 7190,2675 v1(7210,2675) ; C65.2@7162.44,3695 v2@7162.44,3742.56 ; v2(8290,2695) 8290,2688.5 8360,2618.5 v1(8360,2575) 8400,2535 C64.2@8412.44,2535
  Bottom Layer w30: v4(6264,2500) 6805,2500 6870,2565 C67.2@7010,2565 ; v1(6833,3877) 6835.42,3874.58 6871.61,3874.58 7047.19,3699 C65.2@7160,3699 ; C65.2@7162.44,3695 7179.81,3677.63 7179.81,3655.28 7329.72,3655.28 7467.86,3517.14 7520,3517.14 ; C71.2@7921.56,3250 7921.56,3120 7921.22,3115.09 7917.56,3062.56 7880,3025 7732.44,3025 7700,3022.56 C72.2@7690,3022.56 7552.44,3022.56 7520,3055 7520,3517.14 ; v4(7941.92,3493.08) 7544.05,3493.08 7520,3517.14 ; 8304,2372.56 8304,1947 8356,1895 ; C74.1@8304,2401 v4(8348,2458) 8412.44,2522.44 C64.2@8412.44,2535 ; J1.8@8530,1640 8478.47,1588.47 8356,1588.47 8356,1895 ; R2.2@8600,1894.53 R1.2@8450,1894.53 8356.47,1894.53 8356,1895
VCCINT: C38.2 C39.2 C40.2 C41.2 C42.2 C43.2 C44.2 C45.2 C46.2 C47.2 C48.2 C49.2 C50.2 C51.1 C52.2 C53.2 C54.2 C55.2 C56.2 C57.2 C58.2 C59.2 C60.2 C61.2 C62.2 C63.2 C101.1 C118.2 C124.2 C125.2 C126.2 C127.2 C128.2 R62.2 U5.1 U5.10 U5.19 U5.40 U5.53 U5.60 U5.61 U5.74 U5.85 U5.101 U5.115 U5.121 U5.129 U5.140 U5.163 U5.174 U5.180 U5.190 U5.198 U5.204 U5.220 U5.228 U16.2@5945,4845 | length 11801
  Top Layer w8: v1(6950,3615) 6970,3635 6970,3637.09 U5.190@7067.17,3637.09
  Top Layer w10: U5.228@7067.17,2889.06 v1(7175.94,2889.06) ; U5.220@7067.17,3046.54 7068.7,3045 v1(7180,3045) ; U5.204@7067.17,3361.5 v1(7176.5,3361.5) ; U5.198@7067.17,3479.61 7068.95,3481.39 7176.39,3481.39 v1(7180,3485) ; 7100,2526.21 7140,2566.21 U5.1@7140,2580 ; U5.180@7140,3887.09 7140,3759.65 7135.5,3755.15 7135.5,3719.5 7160,3695 7230,3695 7260,3725 v2(7260,3745) ; U5.174@7258.11,3887.09 7259.89,3885.31 7259.89,3825.79 7290.68,3795 v2(7390,3795) ; U5.10@7317.17,2580 7317.17,2672.17 v2(7320,2675) ; U5.163@7474.65,3887.09 7476.43,3885.31 v2(7476.43,3805) ; U5.19@7496.11,2581.78 U5.19@7494.33,2580 7494.33,2629.73 7498.8,2634.2 7498.8,2638.55 7535.24,2675 v1(7570,2675) ; v1(7860,2675) 7872.23,2675 7907.72,2639.52 U5.40@7907.72,2580 ; v2(7910,3795) 7927.4,3812.4 U5.140@7927.4,3887.09 ; v2(8050,3805) 8050,3785 8060,3775 8120,3775 8145.72,3800.72 8145.72,3885.31 U5.129@8143.94,3887.09 ; v1(8150,2675) 8150,2643.35 8161.84,2631.51 U5.53@8161.84,2581.78 ; v2(8280,2935) 8304.48,2910.52 8372.47,2910.52 U5.74@8374.25,2908.74 ; v1(8280,3055) 8312.25,3087.25 8312.25,3122.79 8314.74,3125.28 U5.85@8374.25,3125.28 ; v1(8280,3705) 8289.05,3714.05 8372.47,3714.05 U5.115@8374.25,3715.83 ; v2(8290,3425) 8300,3425 8315.24,3440.24 U5.101@8374.25,3440.24 ; U5.60@8301.42,2580 8301.42,2533.58 8320,2515 v2(8340,2515) ; U5.121@8301.42,3887.09 8323.5,3865 v2(8360,3865) ; U5.61@8374.25,2652.83 8382.17,2652.83 8410,2625 v1(8410,2605)
  Top Layer w30: U16.2@5945,4845 5945,4753.47 R62.2@5970.47,4728 5970.47,4724.45 6030.92,4664 6130,4664 ; v4(6352,4664) 6130,4664 ; C51.1@6600,4786 6352,4786 C101.1@6351,4787 6253,4787 6130,4664
  Bottom Layer w8: v1(6950,3615) 7000,3565 C118.2@7242.44,3565
  Bottom Layer w10: v2(7090,2515) 7220.5,2645.5 7222.22,2645.5 7300,2723.28 7300,2725 C40.2@7300,2727.44 ; v1(7175.94,2889.06) 7180,2885 C59.2@7242.44,2885 ; v1(7176.5,3361.5) 7180,3365 C53.2@7232.44,3365 ; v1(7180,3045) C56.2@7242.44,3045 ; v1(7180,3485) C50.2@7242.44,3485 ; v2(7260,3745) 7280,3745 7287.56,3752.56 C38.2@7310,3752.56 ; v2(7320,2675) 7320,2689.65 7355.35,2725 7360,2725 C41.2@7360,2727.44 ; C49.2@7390,3752.56 v2(7390,3795) ; v2(7476.43,3805) 7476.43,3756.13 C39.2@7480,3752.56 ; C46.2@7500,2727.44 7502.44,2725 7532.44,2695 7550,2695 v1(7570,2675) ; v1(7860,2675) 7910,2725 C47.2@7910,2727.44 ; v2(7910,3795) 7910,3774.72 7930,3754.72 C52.2@7930,3752.56 ; C54.2@8050,3752.56 8050,3754.72 v2(8050,3805) ; C62.2@8060,2727.44 8062.44,2725 8112.44,2675 v1(8150,2675) ; C57.2@8120,3752.56 8122.16,3754.72 8152.44,3785 8165.35,3785 8169.85,3780.5 8315.5,3780.5 8360,3825 v2(8360,3865) ; C61.2@8227.56,2795 8250,2795 8260,2785 8260,2585 8310,2535 8320,2535 v2(8340,2515) ; C48.2@8227.56,2855 8230,2855 8310,2855 8320,2845 8320,2695 v1(8410,2605) ; C63.2@8227.56,2915 8230,2915 8250,2915 v2@8275,2940 ; C60.2@8227.56,3125 8230,3122.56 8270,3082.56 8270,3065 v1(8280,3055) ; C58.2@8227.56,3445 8230,3445 8260,3445 8280,3425 v2(8290,3425) ; C55.2@8227.56,3635 8230,3637.44 8270,3677.44 8270,3705 v1(8280,3705)
  Bottom Layer w30: v4(6352,4664) 6462,4664 6763,4363 6763,4305.53 6770,4298.53 6770,4091.34 6794.5,4066.84 6794.5,4056.54 6966.04,3885 7180,3885 C38.2@7311.22,3753.78 ; C118.2@7242.44,3565 C53.2@7242.44,3355 C45.2@7242.44,3255 C56.2@7242.44,3045 C59.2@7242.44,2885 7242.44,2752.56 7270,2725 7300,2725 C41.2@7355.35,2725 ; C38.2@7310,3752.56 C39.2@7480,3752.56 C44.2@7710,3752.56 C42.2@7820,3752.56 C52.2@7930,3752.56 ; C41.2@7360,2725 7502.44,2725 7910,2725 8062.44,2725 8210,2725 8227.56,2742.56 C61.2@8227.56,2795 C48.2@8227.56,2845 ; C52.2@7930,3754.72 8050,3754.72 8122.16,3754.72 8190.28,3754.72 8230,3715 8230,3637.44 8230,3445 8230,3337.02 8230.19,3336.83 8230.19,3283.17 8230,3282.98 8230,3227.02 8230.19,3226.83 8230.19,3173.17 8230,3172.98 8230,3122.56 8230,3087.02 8230.19,3086.83 8230.19,3033.17 8230,3032.98 8230,2915 8230,2855 C48.2@8230,2854.77
VEE: C110.2 D6.2 P1.1 | length 1201.3
  Top Layer w30: P1.1@4160,4403 4160,4260 4279,4141 C110.2@4472,4141 ; C110.2@4453,4132 4481,4132 4598.2,4014.8 4598.2,3911 ; v5@4598.2,3657 4598.2,3911 ; D6.2@4708,3997 4622,3911 4598.2,3911
  other v5: 4596,3663
VLED+: C108.2 P2.2 | length 1612.4
  Top Layer w7: P2.2@7919,6081.5 7922.28,6081.5 7922.28,6052.54 7928.43,6046.39 7964.81,6046.39 7967.2,6044 8064,6044 8064,6067 8063,6068 v1(8059,6064)
  Top Layer w30: 6929,6109 v4(6999,6109)
  Bottom Layer w7: C108.2@7995,6074.44 8010.44,6059 8059,6059 v1(8059,6064)
  Bottom Layer w10: C108.2@7994,6076 C108.2@8006,6064 ; C108.2@7995,6066 C108.2@7995,6074.44
  Bottom Layer w30: v4(6999,6109) 7021,6131 7166.67,6131 7246.67,6211 7336.85,6211 7372.33,6175.53 7671.67,6175.53 7673.64,6177.5 7706.36,6177.5 7708.33,6175.53 7851.39,6175.53 7853.58,6177.72 7908.7,6177.72 7910.5,6179.52 7910.5,6182.36 7933.64,6205.5 7966.36,6205.5 8004.55,6167.31 8021.83,6167.31 8034.72,6154.42 8040.42,6154.42 8043,6157 8043,6112.05 C108.2@8007.48,6076.52
  other v5: 6743,5925
VPP: C113.1 P1.3 R106.1 U21.3 U25.3 | length 3097.2
  Top Layer w30: P1.3@4263,4431 4723,4431 C113.1@4737,4445 4830,4538 R106.1@4859.47,4538 4859.47,4439.53 v4(4866,4433) ; U21.3@4837,3706 4837,2950 4903,2884
  Bottom Layer w30: U21.3@4837,3706 4837,3852 4900,3915 4951,3915 ; v4(4866,4433) 4938.73,4360.27 4924,4345.54 4924,4302.46 4951,4275.46 v5(4951,4100) 4951,3915 ; U25.3@5528,3744 5357,3915 4951,3915
pads on no net: ?. ?.1 ?.2 ?.3 ?.4 ?.5 ?.6 ?.7 ?.8 ?.9 ?.10 ?.11 ?.12 ?.13 ?.14 ?.15 ?.16 C112.1@4774,2074 C112.2@4674,2074 J2. P1.A P2.0 P2.35 P2.37 P2.38 P2.39 P2.40 S1.3 S1.4 SW1. SW2. U1.5 U1.6 U1.8 U3.8 U3.9 U11.20 U11.22 U11.23 U13.1 U15.3 U15.5 U15.7 U15.9 U15.14 U15.16 U15.18 U16.1@4800,2195 U16.2@4900,2195 U16.3@5000,2195 U19.15 U19.27 U20.15 U20.27
copper on no net:
  other v3: 4300,1295 4400,1295 4500,1295 4600,1295 4700,1295 4800,1295 4900,1295 5000,1295 5100,1295 5200,1295 5300,1295 5400,1295 4300,1595 4400,1595 4500,1595 4600,1595 4700,1595 4800,1595 4900,1595 5000,1595 5100,1595 5200,1595 5300,1595 5400,1595 4300,1895 4400,1895 4500,1895 4600,1895 4700,1895 4800,1895 4900,1895 5000,1895 5100,1895 5200,1895 5300,1895 5400,1895 4300,2195 4400,2195 4500,2195 4600,2195 4700,2195 4800,2195 4900,2195 5000,2195 5100,2195 5200,2195 5300,2195 5400,2195

## Keep-outs
Keep-Out Layer:
  lines w10: 7844,1639 7844,1481 8269,1481 8269,1890 7845,1890 7845,1741 7845,1637 ; 3983,5685 4407,5685 4407,6094 3983,6094 3983,5945 3983,5841 3983,5685 ; 3990,750 4414,750 4414,1159 3990,1159 3990,1010 3990,906 3990,750 ; 9011,1487 9011,1643 9011,1747 9011,1896 9435,1896 9435,1487 9011,1487 ; 10581,817 11005,817 11005,1226 10581,1226 10581,1077 10581,973 10581,817 ; 10691,5634 10691,5790 10691,5894 10691,6043 11115,6043 11115,5634 10691,5634